# Altium PCB NBP11 Xilinx Spartan-III BGA456 Rev1.01.PcbDoc (part 2 of 3)
Units mm, origin at the board's own origin, x right, y up, seen from the top; angles counter-clockwise.
Board outline 69 x 80.99 mm, 6 copper layers (Top Layer, MidLayer1, InternalPlane1, InternalPlane2, MidLayer2, Bottom Layer); 105 components, 277 nets, 967 pads, 559 vias.
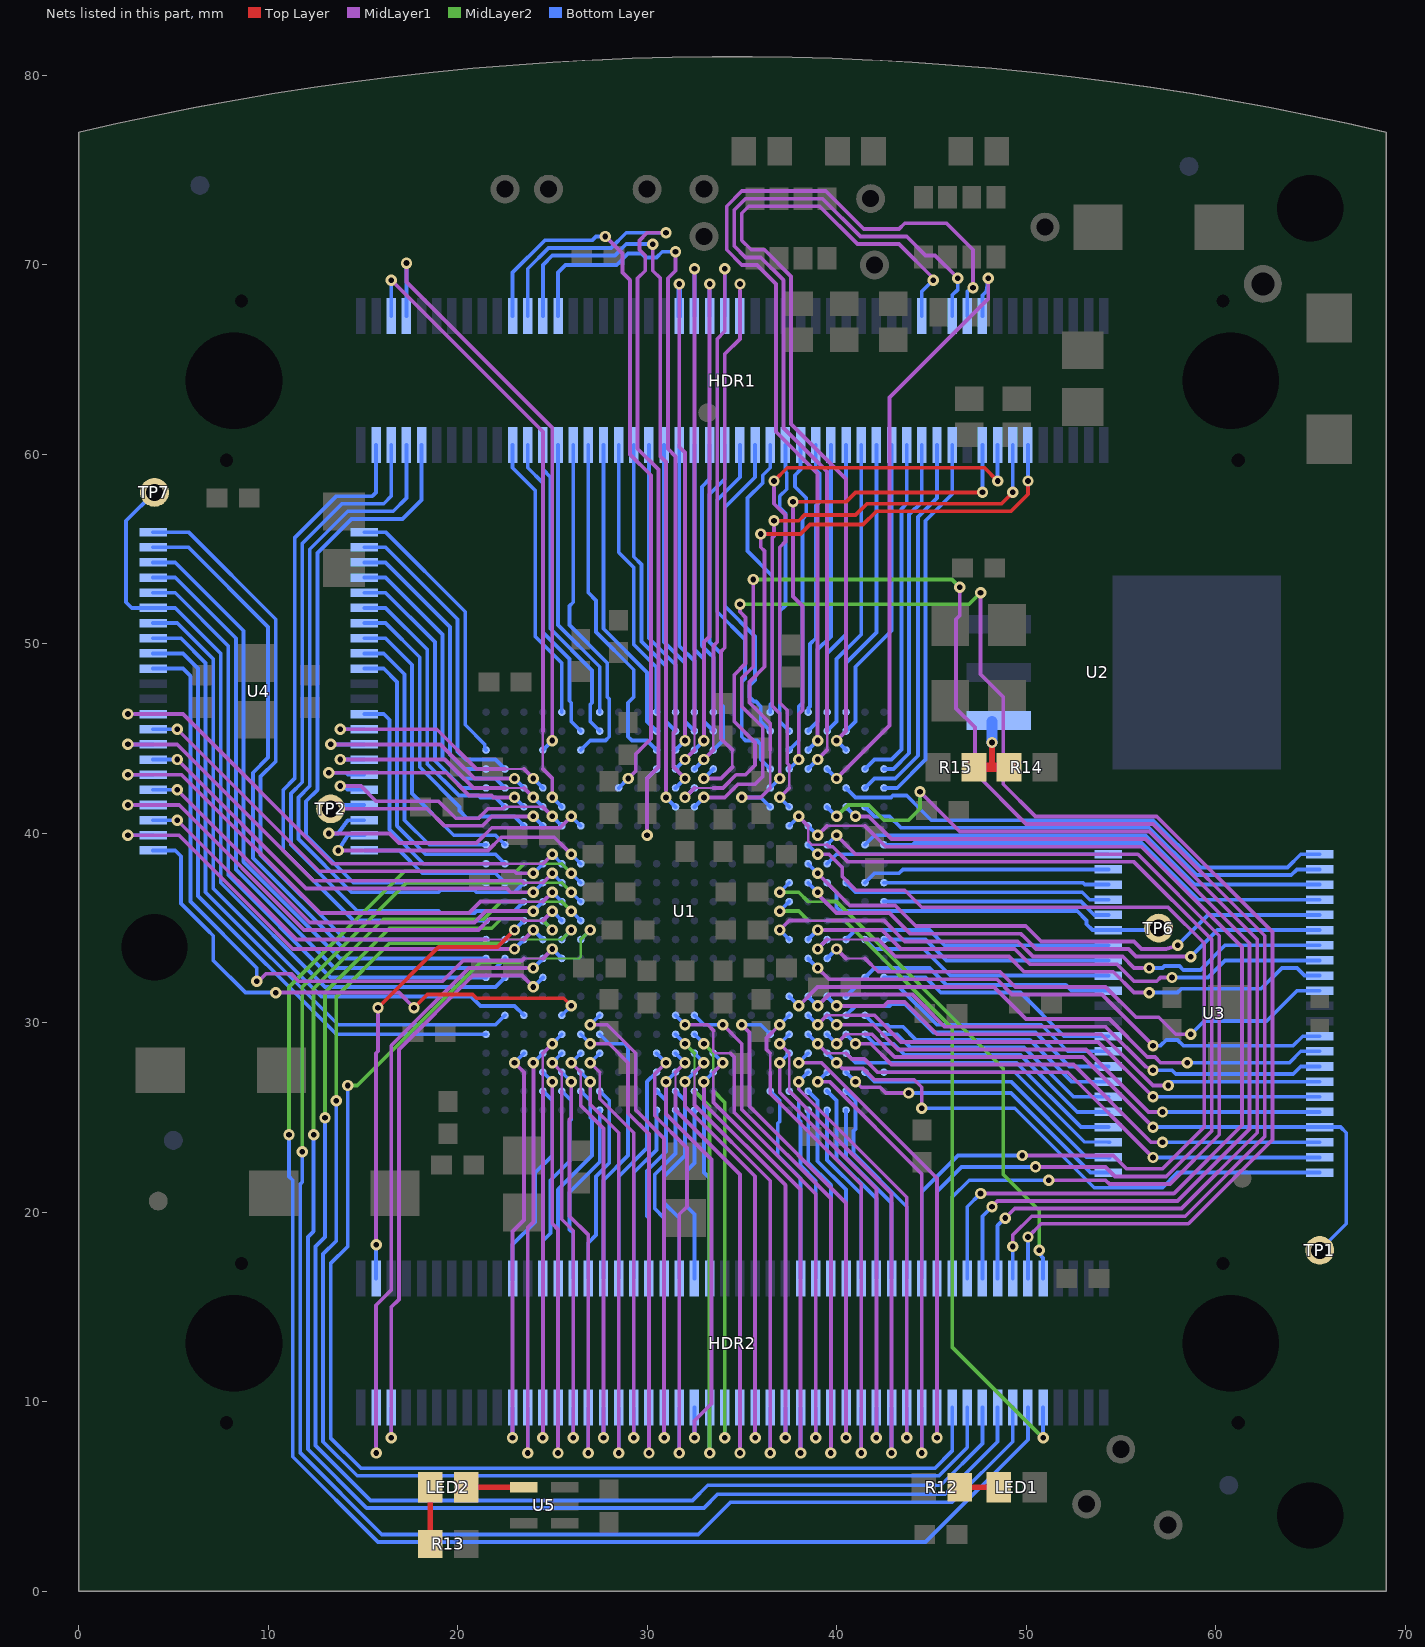
[diagram p6: the nets of this part, all layers, seen from the top]

## Via types
v1: diameter 0.6, hole 0.3, Top Layer to Bottom Layer, tented both sides, 480 vias
v2: diameter 2, hole 1.2, Top Layer to Bottom Layer, tented both sides, 42 vias
v3: diameter 0.9, hole 0.5, Top Layer to Bottom Layer, tented both sides, 33 vias
v4: diameter 0.8, hole 0.5, Top Layer to Bottom Layer, tented both sides, 2 vias
v5: diameter 1.3, hole 0.9, Top Layer to Bottom Layer, tented both sides, 1 vias
v6: diameter 1.8, hole 0.9, Top Layer to Bottom Layer, tented both sides, 1 vias

## Nets (pads, with @x,y where several pads share a name; then routed paths per layer and width w, separated by ;. In a path a pad name is that pad's centre, name@x,y a point inside that pad or via, vN(x,y) a via of type N, cw(c..) or ccw(c..) an arc to the next point about the centre after c; other vN are vias at no path point) (continued)
IO7: HDR2.21 U1.C19 | length 22.6
  MidLayer1 w0.2: v1(22.9,8.1) 22.9,19 23.5,19.6 23.5,27.4 v1(23,27.9)
  Bottom Layer w0.2: v1(22.9,8.1) HDR2.21@22.9,9.7 ; v1(23,27.9) U1.C19@23.5,28.4
IO8: HDR2.23 U1.D19 | length 23.8
  MidLayer1 w0.2: v1(23.7,7.3) 23.7,19.2 24,19.5 v1(24,27.9)
  Bottom Layer w0.2: v1(23.7,7.3) HDR2.23@23.7,9.7 ; v1(24,27.9) U1.D19@24.5,28.4
IO9: HDR2.25 U1.E18 | length 23.3
  MidLayer1 w0.127: 24.5,26.4 24.5,28.4
  MidLayer1 w0.2: v1(24.5,8.1) 24.5,26.4 ; 24.5,28.4 v1(25,28.9)
  Bottom Layer w0.2: v1(24.5,8.1) HDR2.25@24.5,9.7 ; v1(25,28.9) U1.E18@25.5,29.4
IO10: HDR2.27 U1.D20 | length 22.8
  MidLayer1 w0.2: v1(25,26.9) 25,19.4 25.3,19.1 v1(25.3,7.3)
  Bottom Layer w0.2: U1.D20@24.5,27.4 v1(25,26.9) ; v1(25.3,7.3) HDR2.27@25.3,9.7
IO11: HDR2.29 U1.E19 | length 22.6
  MidLayer1 w0.127: 25.5,26.4 25.5,27.4
  MidLayer1 w0.2: v1(25,27.9) 25.5,27.4 ; 25.5,26.4 25.5,19.634 26.1,19.034 v1(26.1,8.1)
  Bottom Layer w0.2: v1(25,27.9) U1.E19@25.5,28.4 ; v1(26.1,8.1) HDR2.29@26.1,9.7
IO12: HDR2.31 U1.E20 | length 23.2
  MidLayer1 w0.2: v1(26,26.9) 26,25 25.9,24.9 25.9,19.8 26.9,18.8 v1(26.9,7.3)
  Bottom Layer w0.2: U1.E20@25.5,27.4 v1(26,26.9) ; v1(26.9,7.3) HDR2.31@26.9,9.7
IO13: HDR2.33 U1.F19 | length 22.8
  MidLayer1 w0.127: 26.5,26.4 26.5,27.4
  MidLayer1 w0.2: v1(26,27.9) 26.5,27.4 ; 26.5,26.4 26.5,25.634 27.7,24.434 v1(27.7,8.1)
  Bottom Layer w0.2: v1(26,27.9) U1.F19@26.5,28.4 ; v1(27.7,8.1) HDR2.33@27.7,9.7
IO14: HDR2.35 U1.F20 | length 23.3
  MidLayer1 w0.2: v1(27,26.9) 27,25.7 28.5,24.2 v1(28.5,7.3)
  Bottom Layer w0.2: U1.F20@26.5,27.4 v1(27,26.9) ; v1(28.5,7.3) HDR2.35@28.5,9.7
IO15: HDR2.37 U1.G19 | length 23.1
  MidLayer1 w0.127: 27.5,26.4 27.5,27.4
  MidLayer1 w0.2: v1(27,27.9) 27.5,27.4 ; 27.5,26.4 27.5,26 29.3,24.2 v1(29.3,8.1)
  Bottom Layer w0.2: v1(27,27.9) U1.G19@27.5,28.4 ; v1(29.3,8.1) HDR2.37@29.3,9.7
IO16: HDR2.39 U1.F18 | length 26.6
  MidLayer1 w0.2: v1(27,28.9) 28,28.9 29,27.9 29,25.234 30.1,24.134 v1(30.1,7.3)
  Bottom Layer w0.2: U1.F18@26.5,29.4 v1(27,28.9) ; v1(30.1,7.3) HDR2.39@30.1,9.7
IO17: HDR2.41 U1.G17 | length 26.2
  MidLayer1 w0.2: v1(27,29.9) 27.9,29.9 29.4,28.4 29.4,25.4 30.9,23.9 v1(30.9,8.1)
  Bottom Layer w0.2: v1(27,29.9) U1.G17@27.5,30.4 ; v1(30.9,8.1) HDR2.41@30.9,9.7
IO18: HDR2.43 U1.K19 | length 24.8
  MidLayer1 w0.2: v1(31,27.9) 30.4,27.3 30.4,25.1 32.1,23.4 32.1,20.3 31.7,19.9 v1(31.7,7.3)
  Bottom Layer w0.2: U1.K19@30.5,28.4 v1(31,27.9) ; v1(31.7,7.3) HDR2.43@31.7,9.7
IO19: HDR2.45 U1.L20 | length 22.5
  MidLayer1 w0.2: v1(31,26.9) 31,25.2 33.4,22.8 33.4,9.9 32.5,9 v1(32.5,8.1)
  Bottom Layer w0.2: v1(31,26.9) U1.L20@31.5,27.4 ; v1(32.5,8.1) HDR2.45@32.5,9.7
IO20: HDR2.47 U1.L18 | length 25.2
  MidLayer2 w0.127: 32.5,26.4 32.5,28.4
  MidLayer2 w0.2: v1(32,28.9) 32.5,28.4 ; 32.5,26.4 33.3,25.6 v1(33.3,7.3)
  Bottom Layer w0.2: U1.L18@31.5,29.4 v1(32,28.9) ; v1(33.3,7.3) HDR2.47@33.3,9.7
IO21: HDR2.49 U1.M18 | length 23.6
  MidLayer2 w0.127: 33.5,26.4 33.5,28.4
  MidLayer2 w0.2: v1(33,28.9) 33.5,28.4 ; 33.5,26.4 34.1,25.8 v1(34.1,8.1)
  Bottom Layer w0.2: U1.M18@32.5,29.4 v1(33,28.9) ; v1(34.1,8.1) HDR2.49@34.1,9.7
IO22: HDR2.51 U1.L19 | length 25.3
  MidLayer1 w0.127: 31.5,26.4 31.5,27.4
  MidLayer1 w0.2: 31.5,26.4 31.5,25.4 34.9,22 v1(34.9,7.3) ; 31.5,27.4 v1(32,27.9)
  Bottom Layer w0.2: U1.L19@31.5,28.4 v1(32,27.9) ; v1(34.9,7.3) HDR2.51@34.9,9.7
IO23: HDR2.53 U1.M20 | length 22.6
  MidLayer1 w0.2: v1(32,26.9) 32,25.606 35.7,21.906 v1(35.7,8.1)
  Bottom Layer w0.2: v1(32,26.9) U1.M20@32.5,27.4 ; v1(35.7,8.1) HDR2.53@35.7,9.7
IO24: HDR2.55 U1.M19 | length 25.6
  MidLayer1 w0.127: 32.5,26.4 32.5,27.4
  MidLayer1 w0.2: 32.5,26.4 32.5,25.672 36.5,21.672 v1(36.5,7.3) ; 32.5,27.4 v1(33,27.9)
  Bottom Layer w0.2: U1.M19@32.5,28.4 v1(33,27.9) ; v1(36.5,7.3) HDR2.55@36.5,9.7
IO25: HDR2.57 U1.N20 | length 22.9
  MidLayer1 w0.2: v1(33,26.9) 33,25.737 37.3,21.437 v1(37.3,8.1)
  Bottom Layer w0.2: v1(33,26.9) U1.N20@33.5,27.4 ; v1(37.3,8.1) HDR2.57@37.3,9.7
IO26: HDR2.59 U1.N19 | length 25.8
  MidLayer1 w0.127: 33.5,26.4 33.5,27.4
  MidLayer1 w0.2: 33.5,26.4 33.5,25.803 38.1,21.203 v1(38.1,7.3) ; 33.5,27.4 v1(34,27.9)
  Bottom Layer w0.2: U1.N19@33.5,28.4 v1(34,27.9) ; v1(38.1,7.3) HDR2.59@38.1,9.7
IO27: HDR2.61 U1.L17 | length 28.3
  MidLayer1 w0.127: 33.4,29.7 33.5,29.6 33.5,28.5 33.6,28.4 34.4,28.4
  MidLayer1 w0.2: v1(32,29.9) 33.2,29.9 33.5,29.6 ; 34.4,28.4 34.6,28.2 34.6,25.269 38.9,20.969 v1(38.9,8.1)
  Bottom Layer w0.2: U1.L17@31.5,30.4 v1(32,29.9) ; v1(38.9,8.1) HDR2.61@38.9,9.7
IO28: HDR2.63 U1.M17 | length 29.1
  MidLayer1 w0.2: v1(34,29.9) 35,28.9 35,25.434 39.7,20.734 v1(39.7,7.3)
  Bottom Layer w0.2: U1.M17@32.5,30.4 33,29.9 v1(34,29.9) ; v1(39.7,7.3) HDR2.63@39.7,9.7
IO29: HDR2.65 U1.T18 | length 27.4
  MidLayer1 w0.2: v1(35,29.9) 35.4,29.5 35.4,25.6 40.5,20.5 v1(40.5,8.1)
  Bottom Layer w0.2: v1(35,29.9) 36,29.9 U1.T18@36.5,29.4 ; v1(40.5,8.1) HDR2.65@40.5,9.7
IO30: HDR2.67 U1.U17 | length 28.1
  MidLayer1 w0.127: 36.5,27.4 36.5,28.4
  MidLayer1 w0.2: 36.5,27.4 36.5,26.269 41.3,21.469 v1(41.3,7.3) ; 36.5,28.4 36.3,28.6 36.3,29.2 v1(37,29.9)
  Bottom Layer w0.2: v1(37,29.9) U1.U17@37.5,30.4 ; v1(41.3,7.3) HDR2.67@41.3,9.7
IO31: HDR2.69 U1.U19 | length 24.2
  MidLayer1 w0.2: v1(37,27.9) 37,26.334 42.1,21.234 v1(42.1,8.1)
  Bottom Layer w0.2: v1(37,27.9) U1.U19@37.5,28.4 ; v1(42.1,8.1) HDR2.69@42.1,9.7
IO32: HDR2.71 U1.U18 | length 27.2
  MidLayer1 w0.127: 37.5,26.4 37.5,28.4
  MidLayer1 w0.2: v1(37,28.9) 37.5,28.4 ; 37.5,26.4 42.9,21 v1(42.9,7.3)
  Bottom Layer w0.2: v1(37,28.9) U1.U18@37.5,29.4 ; v1(42.9,7.3) HDR2.71@42.9,9.7
IO33: HDR2.73 U1.V20 | length 23.5
  MidLayer1 w0.2: v1(38,26.9) 38,26.5 43.7,20.8 v1(43.7,8.1)
  Bottom Layer w0.2: v1(38,26.9) U1.V20@38.5,27.4 ; v1(43.7,8.1) HDR2.73@43.7,9.7
IO34: HDR2.75 U1.W20 | length 25.4
  MidLayer1 w0.2: v1(39,26.9) 39.634,26.9 44.5,22.034 v1(44.5,7.3)
  Bottom Layer w0.2: v1(39,26.9) U1.W20@39.5,27.4 ; v1(44.5,7.3) HDR2.75@44.5,9.7
IO35: HDR2.77 U1.V19 | length 25.8
  MidLayer1 w0.2: v1(38,27.9) 39.2,27.9 45.3,21.8 v1(45.3,8.1)
  Bottom Layer w0.2: v1(38,27.9) U1.V19@38.5,28.4 ; v1(45.3,8.1) HDR2.77@45.3,9.7
JIOA0: HDR1.3 U1.A12 | length 36.8
  Bottom Layer w0.2: HDR1.3@15.7,60.5 15.7,58 15.5,57.8 13.6,57.8 11.4,55.6 11.4,42.9 10.8,42.3 10.8,39.1 14.5,35.4 21,35.4 U1.A12@21.5,35.4
JIOA1: HDR1.5 U1.C11 | length 38.6
  Bottom Layer w0.2: HDR1.5@16.5,60.5 16.5,57.8 16.1,57.4 13.9,57.4 11.8,55.3 11.8,42.7 11.2,42.1 11.2,39.4 14.7,35.9 19,35.9 19.1,35.8 20.9,35.8 21,35.9 23,35.9 U1.C11@23.5,36.4
JIOA2: HDR1.7 U1.C10 | length 37.9
  Bottom Layer w0.2: HDR1.7@17.3,60.5 17.3,57.7 16.6,57 14.2,57 12.2,55 12.2,42.5 11.6,41.9 11.6,39.7 14.4,36.9 19,36.9 19.1,37 20.9,37 21,36.9 23,36.9 U1.C10@23.5,37.4
JIOA3: HDR1.9 U1.A10 | length 35.2
  Bottom Layer w0.2: HDR1.9@18.1,60.5 18.1,57.6 17.1,56.6 14.4,56.6 12.6,54.8 12.6,42.3 12,41.7 12,39.9 14.5,37.4 U1.A10@21.5,37.4
JIOB0: HDR1.83 U1.U4 | length 27.3
  Top Layer w0.2: v1(37.7,57.5) 40.5,57.5 41,58 v1(47.7,58)
  MidLayer1 w0.2: v1(37.7,57.5) 37.7,52.5 38.2,52 38.2,46.5 38,46.3 v1(38,43.9)
  Bottom Layer w0.2: U1.U4@37.5,43.4 v1(38,43.9) ; v1(47.7,58) HDR1.83@47.7,60.5
JIOB1: HDR1.85 U1.U6 | length 32.5
  Top Layer w0.2: v1(36.7,58.6) 37.4,59.3 47.8,59.3 v1(48.5,58.6)
  MidLayer1 w0.127: 37.5,42.4 37.5,43.4
  MidLayer1 w0.2: v1(36.7,58.6) 36.7,57.4 37.3,56.8 37.3,55.4 37,55.1 37,46.9 37.4,46.5 37.4,43.7 37.5,43.6 37.5,43.4 ; v1(37,41.9) 37.5,42.4
  Bottom Layer w0.2: v1(37,41.9) U1.U6@37.5,41.4 ; v1(48.5,58.6) HDR1.85@48.5,60.5
JIOB2: HDR1.87 U1.T5 | length 30.2
  Top Layer w0.2: v1(36.7,56.5) 38,56.5 38.3,56.8 41,56.8 41.6,57.4 48.7,57.4 v1(49.3,58)
  MidLayer1 w0.2: v1(36.7,56.5) 36.7,55.7 36.6,55.6 36.6,46.734 37,46.334 v1(37,42.9)
  Bottom Layer w0.2: U1.T5@36.5,42.4 36.55,42.45 v1(37,42.9) ; v1(49.3,58) HDR1.87@49.3,60.5
JIOB3: HDR1.89 U1.T6 | length 35.3
  Top Layer w0.2: v1(36,55.8) 38.1,55.8 38.6,56.3 41.4,56.3 42.1,57 49.2,57 50.1,57.9 v1(50.1,58.6)
  MidLayer1 w0.127: 36.5,42.4 36.5,44.4
  MidLayer1 w0.2: v1(35,41.9) 36,41.9 36.5,42.4 ; v1(36,55.8) 36,55.1 36.2,54.9 36.2,48.8 35.4,48 35.4,46.9 36.5,45.8 36.5,44.4
  Bottom Layer w0.2: v1(35,41.9) 36,41.9 U1.T6@36.5,41.4 ; v1(50.1,58.6) HDR1.89@50.1,60.5
KBCLOCK: HDR1.22 U1.H5 | length 38.8
  MidLayer1 w0.2: v1(27.8,71.5) 28.7,70.6 28.7,69.6 29.1,69.2 29.1,60 30.2,58.9 30.2,45 29.4,44.2 29.4,43.3 v1(29,42.9)
  Bottom Layer w0.2: HDR1.22@22.9,67.3 22.9,69.6 24.6,71.3 27.1,71.3 27.3,71.5 v1(27.8,71.5) ; U1.H5@28.5,42.4 v1(29,42.9)
KBDATA: HDR1.24 U1.K4 | length 48.3
  MidLayer1 w0.2: v1(30,39.9) 30,42.9 30.6,43.5 30.6,59.2 29.5,60.3 29.5,69.3 29.9,69.7 29.9,70.5 29.6,70.8 29.6,71.3 30,71.7 v1(31,71.7)
  Bottom Layer w0.2: HDR1.24@23.7,67.3 23.7,69.8 24.8,70.9 28.1,70.9 28.9,71.7 v1(31,71.7) ; v1(30,39.9) 30,42.9 U1.K4@30.5,43.4
LCD_BCKL: HDR2.22 U1.D21 | length 11.1
  Bottom Layer w0.2: HDR2.22@22.9,16.4 HDR2.22@22.9,16.5 22.9,18.3 24.1,19.5 24.1,22.1 25,23 25,25.9 U1.D21@24.5,26.4
LCD_E: HDR2.26 U1.E21 | length 10.7
  Bottom Layer w0.2: HDR2.26@24.5,16.5 24.5,18.5 24.9,18.9 24.9,21.7 25.9,22.7 25.9,24.8 26,24.9 26,25.9 U1.E21@25.5,26.4
LED0: HDR2.60 U1.T21 | length 10.6
  Bottom Layer w0.2: U1.T21@36.5,26.4 37,25.9 37,24.8 36.9,24.7 36.9,23 38.1,21.8 HDR2.60@38.1,16.5
LED1: HDR2.62 U1.U21 | length 10.5
  Bottom Layer w0.2: U1.U21@37.5,26.4 38,25.9 38,24.9 38.1,24.8 38.1,22.472 38.9,21.672 HDR2.62@38.9,16.5
LED2: HDR2.64 U1.V22 | length 9.4
  Bottom Layer w0.2: U1.V22@38.5,25.4 38.5,22.637 39.7,21.437 HDR2.64@39.7,16.5
LED3: HDR2.66 U1.V21 | length 10.7
  Bottom Layer w0.2: U1.V21@38.5,26.4 39,25.9 39,22.703 40.5,21.203 HDR2.66@40.5,16.5
LED4: HDR2.68 U1.W22 | length 9.6
  Bottom Layer w0.2: U1.W22@39.5,25.4 39.5,22.769 41.3,20.969 HDR2.68@41.3,16.5
LED5: HDR2.70 U1.W21 | length 11
  Bottom Layer w0.2: U1.W21@39.5,26.4 40,25.9 40,22.834 42.1,20.734 HDR2.70@42.1,16.5
LED6: HDR2.72 U1.Y22 | length 9.9
  Bottom Layer w0.2: U1.Y22@40.5,25.4 40.5,22.9 42.9,20.5 HDR2.72@42.9,16.5
LED7: HDR2.74 U1.Y21 | length 11.3
  Bottom Layer w0.2: U1.Y21@40.5,26.4 41,25.9 41,24.4 40.9,24.3 40.9,23.1 43.7,20.3 HDR2.74@43.7,16.5
MOUSECLOCK: HDR1.26 U1.L6 | length 39.4
  MidLayer1 w0.2: v1@30.4,70.946 v1@30.3,71.046 ; v1(31,41.9) 31,59.6 30.7,59.9 30.7,69.3 30.3,69.7 v1@30.3,71.046 ; v1@30.3,71.046 30.273,71.073 30.246,71.1 v1(30.3,71.1) v1@30.3,71.046
  Bottom Layer w0.2: HDR1.26@24.5,67.3 24.5,70 24.998,70.498 28.298,70.498 28.9,71.1 v1(30.3,71.1) ; v1(31,41.9) U1.L6@31.5,41.4
MOUSEDATA: HDR1.28 U1.L5 | length 38.2
  MidLayer1 w0.2: v1(31.5,70.7) 31.5,69.7 31.1,69.3 31.1,60.3 31.5,59.9 31.5,45.4 31.4,45.3 31.4,43.5 v1(32,42.9)
  Bottom Layer w0.2: HDR1.28@25.3,67.3 25.3,69.6 25.7,70 28.4,70 29,70.6 29.7,70.6 29.9,70.4 30.5,70.4 30.8,70.7 v1(31.5,70.7) ; U1.L5@31.5,42.4 v1(32,42.9)
NetLED1_1: LED1.1 R12.2 | length 2.1
  Top Layer w0.3: R12.2@46.5,5.5 LED1.1@48.55,5.5
NetLED2_1: LED2.1 R13.1 | length 3
  Top Layer w0.3: R13.1@18.55,2.5 LED2.1@18.55,5.5
NetLED2_2: LED2.2 U5.4 | length 3
  Top Layer w0.3: LED2.2@20.45,5.5 U5.4@23.5,5.5
NetR14_2: R14.2 R15.1 U2.1 | length 4.3
  Top Layer w0.3: 48.2,43.5 v1(48.2,44.8)
  Top Layer w0.5: R15.1@47.25,43.5 48.2,43.5 R14.2@49.1,43.5
  Bottom Layer w0.5: v1@48.15,44.95 v1@48.2,45
  Bottom Layer w0.6: v1(48.2,44.8) 48.2,45 U2.1@48.2,45.9
NEXUS_TCK: HDR1.82 U1.V3 | length 50
  MidLayer1 w0.2: v1(39,44.9) 39,59 36.8,61.2 36.8,69 35.8,70 35,70 34.2,70.8 34.2,73.1 35,73.9 39.431,73.9 41.431,71.9 41.7,71.9 ; 41.6,71.9 43.3,71.9 43.6,72.2 45.8,72.2 47.2,70.8 v1(47.2,68.8)
  Bottom Layer w0.2: U1.V3@38.5,44.4 v1(39,44.9) ; HDR1.82@46.9,67.3 46.9,68.6 v1(47.2,68.8)
NEXUS_TDI: HDR1.84 U1.W4 | length 32.5
  MidLayer1 w0.2: v1(40,42.9) 42.8,45.7 42.8,63 48,68.2 v1(48,69.3)
  Bottom Layer w0.2: U1.W4@39.5,43.4 v1(40,42.9) ; HDR1.84@47.7,67.3 47.7,68.4 47.9,68.6 v1(48,69.3)
NEXUS_TDO: HDR1.76 U1.Y3 | length 45.5
  MidLayer1 w0.2: v1(40,44.9) 40.5,45.4 40.5,58.7 37.6,61.6 37.6,69.4 36.2,70.8 35.5,70.8 35,71.3 35,72.7 35,72.734 35.366,73.1 39.1,73.1 41.1,71.1 43.3,71.1 45.1,69.3 v1(45.1,69.2)
  Bottom Layer w0.2: v1(40,44.9) U1.Y3@40.5,44.4 ; HDR1.76@44.5,67.3 44.5,68.6 v1(45.1,69.2)
NEXUS_TMS: HDR1.80 U1.V4 | length 48.3
  MidLayer1 w0.127: 39.5,44.4 39.5,45.4
  MidLayer1 w0.2: v1(39,43.9) 39.5,44.4 ; 39.5,45.4 39.5,59.1 37.2,61.4 37.2,69.2 36,70.4 35.2,70.4 34.6,71 34.6,72.9 35.2,73.5 39.266,73.5 41.266,71.5 43.7,71.5 44.7,70.5 45.2,70.5 v1(46.4,69.3)
  Bottom Layer w0.2: U1.V4@38.5,43.4 v1(39,43.9) ; HDR1.80@46.1,67.3 46.1,68.4 46.4,68.7 v1(46.4,69.3)
RAM0_DATA0: HDR2.42 U1.L22 | length 9.6
  Bottom Layer w0.2: HDR2.42@30.9,16.5 30.9,19.7 30.4,20.2 30.4,22 31.5,23.1 U1.L22@31.5,25.4
RAM0_DATA1: HDR2.40 U1.K21 | length 10.6
  Bottom Layer w0.2: HDR2.40@30.1,16.5 30.1,19.7 30,19.8 30,22.2 31,23.2 31,25.9 U1.K21@30.5,26.4
RAM0_DATA2: HDR2.38 U1.K22 | length 9.4
  Bottom Layer w0.2: HDR2.38@29.3,16.5 29.3,22.1 30.5,23.3 U1.K22@30.5,25.4
RAM0_DATA3: HDR2.36 U1.K20 | length 11.7
  Bottom Layer w0.2: HDR2.36@28.5,16.5 28.5,21.9 30,23.4 30,26.9 U1.K20@30.5,27.4
RAM0_DATA4: HDR2.34 U1.G18 | length 14.5
  Bottom Layer w0.2: U1.G18@27.5,29.4 28,28.9 28.8,28.9 29,28.7 29,23 27.7,21.7 HDR2.34@27.7,16.5
RAM0_DATA5: HDR2.32 U1.G21 | length 10.6
  Bottom Layer w0.2: HDR2.32@26.9,16.5 26.9,18.4 27.3,18.8 27.3,21.9 28,22.6 28,25.9 U1.G21@27.5,26.4
RAM0_DATA6: HDR2.30 U1.G22 | length 9.6
  Bottom Layer w0.2: HDR2.30@26.1,16.5 26.1,18.9 25.9,19.1 25.9,21.066 27.5,22.666 U1.G22@27.5,25.4
RAM0_DATA7: HDR2.28 U1.F21 | length 10.9
  Bottom Layer w0.2: HDR2.28@25.3,16.5 25.3,21.2 27.1,23 27.1,24.9 27,25 27,25.9 U1.F21@26.5,26.4
RAM0_OE: HDR1.41 U1.M2 | length 15.8
  Bottom Layer w0.2: HDR1.41@30.9,60.5 30.9,50.1 32,49 32,45.9 U1.M2@32.5,45.4
RAM0_WE: HDR1.79 U1.AB5 | length 20
  Bottom Layer w0.2: U1.AB5@42.5,42.4 43.2,42.4 44.7,43.9 44.7,56.5 46.1,57.9 HDR1.79@46.1,60.5
RAM1_DATA0: HDR1.45 U1.N2 | length 15.5
  Bottom Layer w0.2: HDR1.45@32.5,60.5 32.5,49.7 33,49.2 33,45.9 U1.N2@33.5,45.4
RAM1_DATA1: HDR1.49 U1.N3 | length 16.9
  Bottom Layer w0.2: U1.N3@33.5,44.4 34,44.9 34,46.7 33.9,46.8 33.9,49.5 33.3,50.1 33.3,57.9 34.1,58.7 HDR1.49@34.1,60.5
RAM1_DATA2: HDR1.53 U1.T2 | length 17.1
  Bottom Layer w0.2: HDR1.53@35.7,60.5 35.7,58.8 34.1,57.2 34.1,52 35.7,50.4 35.7,48.1 35.4,47.8 35.4,47.2 35.641,46.959 35.741,46.959 36,46.7 36,45.9 U1.T2@36.5,45.4
RAM1_DATA3: HDR1.57 U1.U2 | length 15.7
  Bottom Layer w0.2: HDR1.57@37.3,60.5 37.3,59.1 37.367,59.033 37.367,58.167 37,57.8 37,57.2 37.3,56.9 37.3,52.025 37,51.725 37,45.9 U1.U2@37.5,45.4
RAM1_DATA4: HDR1.55 U1.T1 | length 15.2
  Bottom Layer w0.2: U1.T1@36.5,46.4 36.5,46.8 36.6,46.9 36.6,53.6 35.3,54.9 35.3,57.7 36.1,58.5 36.1,58.9 36.5,59.3 HDR1.55@36.5,60.5
RAM1_DATA5: HDR1.51 U1.T4 | length 19.2
  Bottom Layer w0.2: HDR1.51@34.9,60.5 34.9,58.8 33.7,57.6 33.7,51.7 35.17,50.23 35.17,48.17 35,48 35,45.1 35.2,44.9 35.8,44.9 36,44.7 36,43.9 U1.T4@36.5,43.4
RAM1_DATA6: HDR1.47 U1.N1 | length 14.5
  Bottom Layer w0.2: HDR1.47@33.3,60.5 33.3,58.7 32.9,58.3 32.9,49.9 33.3,49.5 33.5,49.3 U1.N1@33.5,46.4
RAM1_DATA7: HDR1.43 U1.M1 | length 14.4
  Bottom Layer w0.2: HDR1.43@31.7,60.5 31.7,49.9 32.5,49.1 U1.M1@32.5,46.4
RAM1_OE: HDR1.39 U1.L1 | length 14.7
  Bottom Layer w0.2: HDR1.39@30.1,60.5 30.1,50.3 31.5,48.9 U1.L1@31.5,46.4
RAM1_WE: HDR1.61 U1.V1 | length 14.4
  Bottom Layer w0.2: U1.V1@38.5,46.4 38.5,46.6 38.6,46.7 38.6,50 38.9,50.3 38.9,57.3 39.1,57.5 39.1,59 38.9,59.2 HDR1.61@38.9,60.5
RAM_ADDR0: HDR1.21 U1.E1 | length 15.2
  Bottom Layer w0.2: HDR1.21@22.9,60.5 22.9,59.3 24.1,58.1 24.1,50.4 25.5,49 U1.E1@25.5,46.4
RAM_ADDR1: HDR1.25 U1.G2 | length 16.4
  Bottom Layer w0.2: HDR1.25@24.5,60.5 24.5,59.2 24.9,58.8 24.9,50.8 27.1,48.6 27.1,46.9 27,46.8 27,45.9 U1.G2@27.5,45.4
RAM_ADDR2: HDR1.29 U1.F3 | length 18.1
  Bottom Layer w0.2: HDR1.29@26.1,60.5 26.1,52.2 25.9,52 25.9,51 27.9,49 27.9,47.2 28,47.1 28,45.1 27.8,44.9 27,44.9 U1.F3@26.5,44.4
RAM_ADDR3: HDR1.33 U1.K2 | length 16.3
  Bottom Layer w0.2: HDR1.33@27.7,60.5 27.7,50.8 30,48.5 30,45.9 U1.K2@30.5,45.4
RAM_ADDR4: HDR1.65 U1.W1 | length 14.5
  Bottom Layer w0.2: U1.W1@39.5,46.4 39.5,49.5 40.5,50.5 HDR1.65@40.5,60.5
RAM_ADDR5: HDR1.69 U1.Y1 | length 14.8
  Bottom Layer w0.2: U1.Y1@40.5,46.4 40.5,49 42.1,50.6 HDR1.69@42.1,60.5
RAM_ADDR6: HDR1.73 U1.AA4 | length 18.5
  Bottom Layer w0.2: U1.AA4@41.5,43.4 42,43.9 42.9,43.9 43.427,44.427 43.427,57.127 43.7,57.4 HDR1.73@43.7,60.5
RAM_ADDR7: HDR1.77 U1.AA5 | length 20.3
  Bottom Layer w0.2: U1.AA5@41.5,42.4 42,42.9 43.1,42.9 44.3,44.1 44.3,56.7 45.3,57.7 HDR1.77@45.3,60.5
RAM_ADDR8: HDR1.75 U1.AB4 | length 18.2
  Bottom Layer w0.2: U1.AB4@42.5,43.4 43,43.4 43.827,44.227 43.827,56.827 44.5,57.5 HDR1.75@44.5,60.5
RAM_ADDR9: HDR1.71 U1.Y2 | length 16.1
  Bottom Layer w0.2: U1.Y2@40.5,45.4 41,45.9 41,48.8 42.9,50.7 HDR1.71@42.9,60.5
RAM_ADDR10: HDR1.67 U1.W2 | length 15.8
  Bottom Layer w0.2: U1.W2@39.5,45.4 40,45.9 40,49.2 41.3,50.5 HDR1.67@41.3,60.5
RAM_ADDR11: HDR1.63 U1.V2 | length 15.6
  Bottom Layer w0.2: U1.V2@38.5,45.4 39,45.9 39,49.7 39.7,50.4 HDR1.63@39.7,60.5
RAM_ADDR12: HDR1.59 U1.U3 | length 16.8
  Bottom Layer w0.2: U1.U3@37.5,44.4 38,44.9 38,46.7 38.2,46.9 38.2,56.6 38.4,56.8 38.4,57.7 37.8,58.3 37.8,58.9 38.1,59.2 HDR1.59@38.1,60.5
RAM_ADDR13: HDR1.35 U1.K1 | length 14.9
  Bottom Layer w0.2: HDR1.35@28.5,60.5 28.5,54.834 29.3,54.034 29.3,49.969 30.5,48.769 U1.K1@30.5,46.4
RAM_ADDR14: HDR1.31 U1.K3 | length 18.3
  Bottom Layer w0.2: HDR1.31@26.9,60.5 26.9,52.7 27.3,52.3 27.3,50.634 29.3,48.634 29.3,47.2 29,46.9 29,45.1 29.2,44.9 30,44.9 U1.K3@30.5,44.4
RAM_ADDR15: HDR1.27 U1.G1 | length 15
  Bottom Layer w0.2: HDR1.27@25.3,60.5 25.3,51 27.5,48.8 U1.G1@27.5,46.4
RAM_ADDR16: HDR1.23 U1.F2 | length 16.3
  Bottom Layer w0.2: HDR1.23@23.7,60.5 23.7,59.3 24.5,58.5 24.5,50.6 25.9,49.2 25.9,47 26,46.9 26,45.9 U1.F2@26.5,45.4
RAM_CS: HDR1.37 U1.L2 | length 16
  Bottom Layer w0.2: HDR1.37@29.3,60.5 29.3,54.6 29.7,54.2 29.7,50.134 31,48.834 31,45.9 U1.L2@31.5,45.4
RED0: HDR1.6 U1.E6 | length 33.4
  MidLayer1 w0.127: 24.5,43.4 24.5,45.4
  MidLayer1 w0.2: v1(16.5,69.2) 24.5,61.2 24.5,45.4 ; 24.5,43.4 25,42.9 v1(25,41.9)
  Bottom Layer w0.2: HDR1.6@16.5,67.3 v1(16.5,69.2) ; v1(25,41.9) 25.45,41.45 U1.E6@25.5,41.4
RED1: HDR1.8 U1.D3 | length 31.9
  MidLayer1 w0.2: v1(17.3,70.1) 17.3,69.1 25,61.4 v1(25,44.9)
  Bottom Layer w0.2: HDR1.8@17.3,67.3 v1(17.3,70.1) ; U1.D3@24.5,44.4 v1(25,44.9)
REF_CLK: HDR2.4 U1.C12 | length 23.9
  Top Layer w0.2: v1(15.8,30.8) 19,34 22.1,34 v1(23,34.9)
  MidLayer1 w0.2: v1(15.7,18.3) 15.7,28.4 15.8,28.5 v1(15.8,30.8)
  Bottom Layer w0.2: HDR2.4@15.7,16.5 v1(15.7,18.3) ; v1(23,34.9) U1.C12@23.5,35.4
SCL: HDR2.5 U1.D15 | length 31.9
  MidLayer1 w0.2: v1(16.5,8.1) 16.5,15 16.9,15.4 16.9,28.6 20.8,32.5 23.4,32.5 v1(24,31.9)
  Bottom Layer w0.2: v1(16.5,8.1) HDR2.5@16.5,9.7 ; v1(24,31.9) U1.D15@24.5,32.4
SDA: HDR2.3 U1.D14 | length 34.1
  MidLayer1 w0.2: v1(15.7,7.3) 15.7,15.1 16.5,15.9 16.5,28.8 20.6,32.9 v1(24,32.9)
  Bottom Layer w0.2: v1(15.7,7.3) HDR2.3@15.7,9.7 ; v1(24,32.9) U1.D14@24.5,33.4
SP0: HDR2.79 U1.F13 | length 72.5
  MidLayer2 w0.127: 23.5,33.4 26.4,33.4 26.5,33.5 26.5,34.4
  MidLayer2 w0.2: v1(14.2,26.7) 14.7,26.7 21.2,33.2 23.3,33.2 23.5,33.4 ; 26.5,34.4 v1(27,34.9)
  Bottom Layer w0.2: v1(14.2,26.7) 14.2,18.2 13.3,17.3 13.3,8.1 14.9,6.5 45.2,6.5 46.1,7.4 HDR2.79@46.1,9.7 ; U1.F13@26.5,34.4 26.55,34.45 v1(27,34.9)
SP1: HDR2.81 U1.E13 | length 75.8
  MidLayer2 w0.127: 22.5,34.4 25.5,34.4
  MidLayer2 w0.2: v1(13.6,25.9) 13.6,31.4 16.4,34.2 22.3,34.2 22.5,34.4 ; 25.5,34.4 v1(26,34.9)
  Bottom Layer w0.2: v1(13.6,25.9) 13.6,18.5 12.9,17.8 12.9,7.9 14.7,6.1 45.4,6.1 46.9,7.6 HDR2.81@46.9,9.7 ; U1.E13@25.5,34.4 25.55,34.45 v1(26,34.9)
SP2: HDR2.83 U1.D12 | length 78.2
  MidLayer2 w0.127: 23.5,35.4 24.5,35.4
  MidLayer2 w0.2: v1(13,25) 13,31.6 16.4,35 21.8,35 22.3,35.5 23.4,35.5 23.5,35.4 ; 24.5,35.4 v1(25,34.9)
  Bottom Layer w0.2: v1(13,25) 13,18.7 12.5,18.2 12.5,7.7 15.4,4.8 32.4,4.8 33.2,5.6 45.5,5.6 47.7,7.8 HDR2.83@47.7,9.7 ; U1.D12@24.5,35.4 v1(25,34.9)
SP3: HDR2.85 U1.F12 | length 81.8
  MidLayer2 w0.127: 23.5,36.4 25.5,36.4
  MidLayer2 w0.2: v1(12.4,24.1) 12.4,31.8 16.073,35.473 21.373,35.473 22.3,36.4 23.5,36.4 ; 25.5,36.4 v1(26,35.9)
  Bottom Layer w0.2: v1(12.4,24.1) 12.4,19 12.1,18.7 12.1,7.5 15.2,4.4 33,4.4 33.723,5.123 45.723,5.123 48.5,7.9 HDR2.85@48.5,9.7 ; v1(26,35.9) U1.F12@26.5,35.4
SP4: HDR2.87 U1.F11 | length 85.2
  MidLayer2 w0.127: 23.5,37.4 25.5,37.4
  MidLayer2 w0.2: v1(11.8,23.2) 11.8,31.9 17.3,37.4 23.5,37.4 ; 25.5,37.4 v1(26,36.9)
  Bottom Layer w0.2: v1(11.8,23.2) 11.8,21.6 11.7,21.5 11.7,7.3 16,3 32.7,3 34.4,4.7 46.1,4.7 49.3,7.9 HDR2.87@49.3,9.7 ; v1(26,36.9) 26.45,36.45 U1.F11@26.5,36.4
SP5: HDR2.89 U1.F10 | length 88
  MidLayer2 w0.127: 23.5,38.4 25.5,38.4
  MidLayer2 w0.2: v1(11.1,24.1) 11.1,31.9 17.2,38 23.1,38 23.5,38.4 ; 25.5,38.4 v1(26,37.9)
  Bottom Layer w0.2: v1(11.1,24.1) 11.1,21.9 11.3,21.7 11.3,7.1 15.8,2.6 44.7,2.6 50.1,8 HDR2.89@50.1,9.7 ; v1(26,37.9) U1.F10@26.5,37.4
SP6: HDR2.91 U1.U11 | length 37.6
  MidLayer2 w0.127: 38.5,35.4 39.5,35.4
  MidLayer2 w0.2: v1(37,35.9) 38,35.9 38.5,35.4 ; 39.5,35.4 40.434,35.4 46.1,29.734 46.1,12.9 v1(50.9,8.1)
  Bottom Layer w0.2: v1(37,35.9) U1.U11@37.5,36.4 ; v1(50.9,8.1) HDR2.91@50.9,9.7
SP7: HDR2.90 U1.M5 | length 83.6
  MidLayer1 w0.127: 32.5,42.4 33.5,42.4
  MidLayer1 w0.2: v1(32,41.9) 32.5,42.4 ; 33.5,42.4 34,42.4 34.7,43.1 35.2,43.1 35.7,43.6 35.7,44.8 34.6,45.9 34.6,48.366 35.2,48.966 35.2,51.4 34.9,51.7 v1(34.9,52.1) ; v1(47.6,52.7) 47.6,48.4 48.8,47.2 48.8,42.6 50.5,40.9 56.9,40.9 63,34.8 63,23.834 58.566,19.4 57.9,19.4 50.8,19.4 v1(50.1,18.7)
  MidLayer2 w0.2: v1(34.9,52.1) 47,52.1 v1(47.6,52.7)
  Bottom Layer w0.2: v1(32,41.9) U1.M5@32.5,42.4 ; HDR2.90@50.1,16.5 50.1,18.3 v1(50.1,18.7)
SP8: HDR2.92 U1.U10 | length 28.3
  MidLayer2 w0.127: 38.5,36.4 39.5,36.4
  MidLayer2 w0.2: v1(37,36.9) 38,36.9 38.5,36.4 ; 39.5,36.4 40,36.4 48.8,27.6 48.8,22 50.7,20.1 v1(50.7,18)
  Bottom Layer w0.2: v1(37,36.9) U1.U10@37.5,37.4 ; v1(50.7,18) 50.7,17.8 50.9,17.6 HDR2.92@50.9,16.5
SP9: HDR2.88 U1.M6 | length 83.9
  MidLayer1 w0.2: v1(33,41.9) 34,41.9 34.1,41.9 34.8,42.6 35.7,42.6 36.1,43 36.1,43.6 36.1,45.6 35,46.7 35,48.2 35.6,48.8 v1(35.6,53.4) ; v1(46.5,53) 46.5,51.5 46.3,51.3 46.3,46.6 47.3,45.6 47.3,43.2 50,40.5 56.7,40.5 62.6,34.6 62.6,24 58.4,19.8 50.3,19.8 49.3,18.8 v1(49.3,18.2)
  MidLayer2 w0.2: v1(35.6,53.4) 46.1,53.4 v1(46.5,53)
  Bottom Layer w0.2: U1.M6@32.5,41.4 v1(33,41.9) ; HDR2.88@49.3,16.5 v1(49.3,18.2)
SP10: HDR2.86 U1.W6 | length 56.6
  MidLayer1 w0.2: v1(44.4,42.2) 46.5,40.1 56.5,40.1 62.2,34.4 62.2,24.2 58.2,20.2 49.4,20.2 v1(48.9,19.7)
  MidLayer2 w0.2: v1(40,40.9) 40.6,41.5 41.7,41.5 42.5,40.7 43.8,40.7 44.4,41.3 v1(44.4,42.2)
  Bottom Layer w0.2: U1.W6@39.5,41.4 v1(40,40.9) ; HDR2.86@48.5,16.5 48.5,19.3 v1(48.9,19.7)
SP11: HDR2.84 U1.Y6 | length 53.4
  MidLayer1 w0.2: v1(41,40.9) 41.7,40.9 42.9,39.7 56.3,39.7 61.8,34.2 61.8,24.4 58,20.6 48.5,20.6 v1(48.2,20.3)
  Bottom Layer w0.2: U1.Y6@40.5,41.4 v1(41,40.9) ; HDR2.84@47.7,16.5 47.7,19.8 v1(48.2,20.3)
SP12: HDR2.82 U1.V7 | length 55.4
  MidLayer1 w0.127: 39.5,40.4 41.5,40.4
  MidLayer1 w0.2: v1(39,39.9) 39.5,40.4 ; 41.5,40.4 42.6,39.3 56.1,39.3 61.4,34 61.4,24.6 57.8,21 v1(47.6,21)
  Bottom Layer w0.2: U1.V7@38.5,40.4 v1(39,39.9) ; HDR2.82@46.9,16.5 46.9,20.3 v1(47.6,21)
SP13: HDR2.80 U1.W8 | length 53.5
  MidLayer1 w0.2: v1(40,39.9) 41,38.9 42,38.9 55.9,38.9 60.2,34.6 60.2,24.1 57.6,21.5 54.4,21.5 54.2,21.7 v1(51.2,21.7)
  Bottom Layer w0.2: U1.W8@39.5,39.4 v1(40,39.9) ; HDR2.80@46.1,16.5 46.1,20.8 47,21.7 v1(51.2,21.7)
SP14: HDR2.78 U1.U7 | length 56.7
  MidLayer1 w0.127: 38.5,40.4 38.5,39.6 38.7,39.4 39.5,39.4
  MidLayer1 w0.2: v1(38,40.9) 38.5,40.4 ; 39.5,39.4 39.6,39.3 39.8,39.3 40.6,38.5 55.7,38.5 59.8,34.4 59.8,24.3 57.4,21.9 54.7,21.9 54.2,22.4 v1(50.5,22.4)
  Bottom Layer w0.2: U1.U7@37.5,40.4 v1(38,40.9) ; HDR2.78@45.3,16.4 HDR2.78@45.3,16.5 45.3,21.1 46.6,22.4 v1(50.5,22.4)
SP15: HDR2.76 U1.V8 | length 54.5
  MidLayer1 w0.2: v1(39,38.9) 39.6,38.9 40.3,38.2 40.3,37.731 41.031,37 43.6,37 44.5,36.1 57.5,36.1 59.4,34.2 59.4,24.5 57.2,22.3 55.3,22.3 54.6,23 v1(49.8,23)
  Bottom Layer w0.2: U1.V8@38.5,39.4 v1(39,38.9) ; HDR2.76@44.5,16.5 44.5,21.1 46.4,23 v1(49.8,23)
SPI_CLK: HDR1.46 U1.L4 | length 29.3
  MidLayer1 w0.127: 32.5,44.4 32.5,45.4
  MidLayer1 w0.2: v1(32,43.9) 32.5,44.4 ; 32.5,45.4 v1(32.5,69.8)
  Bottom Layer w0.2: U1.L4@31.5,43.4 v1(32,43.9) ; HDR1.46@32.5,67.3 32.5,69 v1(32.5,69.8)
SPI_DIN: HDR1.44 U1.L3 | length 26.6
  MidLayer1 w0.2: v1(31.7,69) 31.7,60.4 32,60.1 v1(32,44.9)
  Bottom Layer w0.2: U1.L3@31.5,44.4 v1(32,44.9)
  Bottom Layer w0.3: HDR1.44@31.7,67.3 v1(31.7,69)
SPI_DOUT: HDR1.50 U1.M4 | length 29.6
  MidLayer1 w0.127: 33.5,44.4 33.5,45.4
  MidLayer1 w0.2: v1(33,43.9) 33.5,44.4 ; 33.5,45.4 33.5,49.9 33.7,50.1 33.7,66.1 34.1,66.5 v1(34.1,69.8)
  Bottom Layer w0.2: U1.M4@32.5,43.4 v1(33,43.9) ; HDR1.50@34.1,67.3 v1(34.1,69.8)
SPI_MODE: HDR1.52 U1.N4 | length 30.3
  MidLayer1 w0.127: 34.5,43.5 34.5,44.4
  MidLayer1 w0.2: v1(33,42.9) 33.9,42.9 34.5,43.5 ; 34.5,44.4 33.9,45 33.9,49.6 34.1,49.8 34.1,65.3 34.9,66.1 v1(34.9,69)
  Bottom Layer w0.2: v1(33,42.9) U1.N4@33.5,43.4 ; HDR1.52@34.9,67.3 v1(34.9,69)
SPI_SEL: HDR1.48 U1.M3 | length 26.6
  MidLayer1 w0.2: v1(33,44.9) 33,50.1 33.3,50.4 v1(33.3,69)
  Bottom Layer w0.2: U1.M3@32.5,44.4 v1(33,44.9) ; HDR1.48@33.3,67.3 v1(33.3,69)
SRAM0_A0: U1.AA18 U3.5 | length 14.5
  Bottom Layer w0.2: U1.AA18@41.5,29.4 42,28.9 43,28.9 43.6,28.3 49.7,28.3 52.7,25.3 U3.5@54.35,25.3
SRAM0_A1: U1.Y19 U3.4 | length 15.5
  Bottom Layer w0.2: U1.Y19@40.5,28.4 41,27.9 49.5,27.9 52.9,24.5 U3.4@54.35,24.5
SRAM0_A2: U1.AB20 U3.3 | length 13.4
  Bottom Layer w0.2: U1.AB20@42.5,27.4 49.4,27.4 53.075,23.725 U3.3@54.35,23.7 U3.3@54.4,23.7
SRAM0_A3: U1.AA20 U3.2 | length 14.8
  Bottom Layer w0.2: U1.AA20@41.5,27.4 42,26.9 49.2,26.9 53.175,22.925 U3.2@54.35,22.9 U3.2@54.4,22.9
SRAM0_A4: U1.Y20 U3.1 | length 16
  MidLayer1 w0.2: v1(41,26.9) 41.3,26.6 42.3,26.6 42.6,26.3 v1(43.8,26.3)
  Bottom Layer w0.2: U1.Y20@40.5,27.4 v1(41,26.9) ; v1(43.8,26.3) 49.2,26.3 53.4,22.1 U3.1@54.35,22.1
SRAM0_A5: U1.W19 U3.44 | length 29.9
  MidLayer1 w0.2: v1(40,27.9) 40.3,27.6 41.4,27.6 42,27 44.1,27 44.5,26.6 v1(44.5,25.5)
  Bottom Layer w0.2: U1.W19@39.5,28.4 v1(40,27.9) ; v1(44.5,25.5) 49.4,25.5 53.6,21.3 57.2,21.3 58,22.1 U3.44@65.5,22.1
SRAM0_A6: U1.V18 U3.43 | length 29.7
  MidLayer1 w0.127: 39.5,28.4 40.5,28.4
  MidLayer1 w0.2: v1(39,28.9) 39.5,28.4 ; 40.5,28.4 40.8,28.1 41.466,28.1 42.166,27.4 52.2,27.4 v1(56.7,22.9)
  Bottom Layer w0.2: U1.V18@38.5,29.4 v1(39,28.9) ; v1(56.7,22.9) U3.43@65.5,22.9
SRAM0_A7: U1.Y18 U3.42 | length 27.4
  MidLayer1 w0.2: v1(41,28.9) 41.8,28.9 42.9,27.8 52.5,27.8 56.6,23.7 v1(57.2,23.7)
  Bottom Layer w0.2: U1.Y18@40.5,29.4 v1(41,28.9) ; v1(57.2,23.7) U3.42@65.5,23.7
SRAM0_A8: U1.AB11 U3.18 | length 12.1
  Bottom Layer w0.2: U1.AB11@42.5,36.4 52.9,36.4 53.6,35.7 U3.18@54.35,35.7
SRAM0_A9: U1.V9 U3.27 | length 29.6
  MidLayer1 w0.2: v1(39,37.9) 40.7,36.2 43.1,36.2 44.181,35.119 49.981,35.119 50.8,34.3 55.7,34.3 56.1,33.9 57.4,33.9 v1(58,34.1)
  Bottom Layer w0.2: U1.V9@38.5,38.4 v1(39,37.9) ; v1(58,34.1) 59.6,35.7 U3.27@65.5,35.7
SRAM0_A10: U1.AB8 U3.26 | length 24.3
  Bottom Layer w0.2: U1.AB8@42.5,39.4 44,39.4 44.1,39.5 56.1,39.5 59.1,36.5 U3.26@65.5,36.5
SRAM0_A11: U1.AA8 U3.25 | length 25.3
  Bottom Layer w0.2: U1.AA8@41.5,39.4 42,39.9 56.3,39.9 58.9,37.3 U3.25@65.5,37.3
SRAM0_A12: U1.AA6 U3.24 | length 25.6
  Bottom Layer w0.2: U1.AA6@41.5,41.4 42,40.9 42.8,40.9 43.4,40.3 56.5,40.3 59,37.8 64,37.8 64.3,38.1 U3.24@65.5,38.1
SRAM0_A13: U1.Y5 U3.23 | length 27.1
  Bottom Layer w0.2: U1.Y5@40.5,42.4 41,41.9 42.868,41.9 42.968,42 43.7,42 44.5,41.2 45,40.7 56.7,40.7 59.2,38.2 63.8,38.2 64.5,38.9 U3.23@65.5,38.9
SRAM0_A14: U1.W9 U3.22 | length 15.1
  Bottom Layer w0.2: U1.W9@39.5,38.4 40,38.9 U3.22@54.35,38.9
SRAM0_A15: U1.AA10 U3.21 | length 13.1
  Bottom Layer w0.2: U1.AA10@41.5,37.4 41.55,37.45 42,37.9 43.3,37.9 43.5,38.1 U3.21@54.35,38.1
SRAM0_A16: U1.AB10 U3.20 | length 11.9
  Bottom Layer w0.2: U1.AB10@42.5,37.4 53,37.4 53.1,37.3 U3.20@54.35,37.3
SRAM0_A17: U1.Y10 U3.19 | length 14.2
  Bottom Layer w0.2: U1.Y10@40.5,37.4 41,36.9 52.966,36.9 53.366,36.5 U3.19@54.35,36.5
SRAM0_A18: U1.V10 U3.28 | length 29.3
  MidLayer1 w0.2: v1(39,36.9) 39,36.8 40,35.8 42.8,35.8 43.9,34.7 49.731,34.7 49.963,34.469 50.531,33.9 55.4,33.9 55.8,33.5 v1(58.7,33.5)
  Bottom Layer w0.2: U1.V10@38.5,37.4 v1(39,36.9) ; v1(58.7,33.5) 60.1,34.9 U3.28@65.5,34.9
SRAM0_D0: U1.AA17 U3.7 | length 14.3
  Bottom Layer w0.2: U1.AA17@41.5,30.4 42,29.9 42.7,29.9 42.8,29.8 43.5,29.8 44.2,29.1 50.2,29.1 52.4,26.9 U3.7@54.35,26.9
SRAM0_D1: U1.Y17 U3.8 | length 15.5
  Bottom Layer w0.2: U1.Y17@40.5,30.4 41,30.9 42.8,30.9 42.9,31 43.6,31 45.1,29.5 50.5,29.5 52.3,27.7 U3.8@54.35,27.7
SRAM0_D2: U1.Y16 U3.9 | length 15.5
  Bottom Layer w0.2: U1.Y16@40.5,31.4 41,31.9 43.3,31.9 45.3,29.9 50.8,29.9 52.2,28.5 U3.9@54.35,28.5
SRAM0_D3: U1.AB15 U3.10 | length 13.1
  Bottom Layer w0.2: U1.AB15@42.5,32.4 44.7,32.4 45.5,31.6 49.7,31.6 52,29.3 U3.10@54.35,29.3
SRAM0_D4: U1.AA15 U3.13 | length 13.6
  Bottom Layer w0.2: U1.AA15@41.5,32.4 42,32.9 44.9,32.9 45.8,32 52.1,32 52.4,31.7 U3.13@54.35,31.7
SRAM0_D5: U1.AA13 U3.14 | length 13.6
  Bottom Layer w0.2: U1.AA13@41.5,34.4 42,33.9 44.6,33.9 46,32.5 U3.14@54.35,32.5
SRAM0_D6: U1.AB13 U3.15 | length 12.3
  Bottom Layer w0.2: U1.AB13@42.5,34.4 43,34.4 44.7,34.4 45.8,33.3 U3.15@54.35,33.3
SRAM0_D7: U1.Y13 U3.16 | length 14.4
  Bottom Layer w0.2: U1.Y13@40.5,34.4 40.55,34.45 41,34.9 44.9,34.9 45.7,34.1 U3.16@54.35,34.1
SRAM0_D8: U1.U13 U3.29 | length 31.1
  MidLayer1 w0.127: 38.5,35.4 39.5,35.4
  MidLayer1 w0.2: v1(37,34.9) 37.5,35.4 38.5,35.4 ; 39.5,35.4 42.5,35.4 43.6,34.3 49.566,34.3 50.366,33.5 55.1,33.5 55.7,32.9 v1(56.5,32.9)
  Bottom Layer w0.2: v1(37,34.9) U1.U13@37.5,34.4 ; v1(56.5,32.9) 57.2,32.9 57.3,33 58.1,33 58.3,32.8 59.2,32.8 60.5,34.1 U3.29@65.5,34.1
SRAM0_D9: U1.V13 U3.30 | length 28.8
  MidLayer1 w0.2: v1(39,34.9) 42.4,34.9 43.4,33.9 49.4,33.9 50.2,33.1 54.8,33.1 55.7,32.2 56.9,32.2 57.1,32.4 v1(57.7,32.4)
  Bottom Layer w0.2: U1.V13@38.5,34.4 v1(39,34.9) ; v1(57.7,32.4) 59.6,32.4 60.5,33.3 U3.30@65.5,33.3
SRAM0_D10: U1.W13 U3.31 | length 29.3
  MidLayer1 w0.127: 39.5,34.4 41.5,34.4
  MidLayer1 w0.2: v1(39,33.9) 39.5,34.4 ; 41.5,34.4 42.2,34.4 43.1,33.5 49.1,33.5 49.9,32.7 54.6,32.7 55.7,31.6 v1(56.5,31.6)
  Bottom Layer w0.2: v1(39,33.9) U1.W13@39.5,34.4 ; v1(56.5,31.6) 58,31.6 58.2,31.8 62.4,31.8 63.5,32.9 64.3,32.9 64.7,32.5 U3.31@65.5,32.5
SRAM0_D11: U1.W14 U3.32 | length 29
  MidLayer1 w0.127: 40.5,33.4 41.5,33.4
  MidLayer1 w0.2: v1(40,33.9) 40.5,33.4 ; 41.5,33.4 42.2,32.7 48.631,32.7 49.431,31.9 54.2,31.9 55.8,30.3 57,30.3 57.9,29.4 v1(58.7,29.4)
  Bottom Layer w0.2: U1.W14@39.5,33.4 v1(40,33.9) ; v1(58.7,29.4) 59.4,30.1 62.7,30.1 64.3,31.7 U3.32@65.5,31.7
SRAM0_D12: U1.V14 U3.35 | length 29.4
  MidLayer1 w0.2: v1(39,32.9) 39.6,32.3 48.466,32.3 49.266,31.5 54,31.5 v1(56.7,28.8)
  Bottom Layer w0.2: U1.V14@38.5,33.4 v1(39,32.9) ; v1(56.7,28.8) 57.1,28.8 57.4,29.1 58,29.1 58.3,28.8 62.4,28.8 64.1,28.8 64.6,29.3 U3.35@65.5,29.3
SRAM0_D13: U1.U16 U3.36 | length 30.5
  MidLayer1 w0.2: v1(38,30.9) 39,31.9 48.3,31.9 50,30.2 54.4,30.2 56.4,28.2 56.8,28.2 57.1,27.9 v1(58.5,27.9)
  Bottom Layer w0.2: U1.U16@37.5,31.4 v1(38,30.9) ; v1(58.5,27.9) 63.9,27.9 64.5,28.5 U3.36@65.5,28.5
SRAM0_D14: U1.V16 U3.37 | length 29.3
  MidLayer1 w0.2: v1(39,30.9) 39.6,31.5 44,31.5 45.7,29.8 54.2,29.8 56.3,27.7 v1(56.7,27.5)
  Bottom Layer w0.2: U1.V16@38.5,31.4 v1(39,30.9) ; v1(56.7,27.5) 57.7,27.5 57.9,27.3 64.1,27.3 64.5,27.7 U3.37@65.5,27.7
SRAM0_D15: U1.W16 U3.38 | length 28.3
  MidLayer1 w0.2: v1(40,30.9) 42.5,30.9 42.7,31.1 43.6,31.1 45.3,29.4 53.966,29.4 56.7,26.7 v1(57.5,26.7)
  Bottom Layer w0.2: U1.W16@39.5,31.4 v1(40,30.9) ; v1(57.5,26.7) 57.5,26.9 U3.38@65.5,26.9
SRAM0_E: U1.AB18 U3.6 | length 13.2
  Bottom Layer w0.2: U1.AB18@42.5,29.4 43.2,29.4 43.9,28.7 49.9,28.7 52.5,26.1 U3.6@54.35,26.1
SRAM0_LB: U1.V17 U3.39 | length 29.2
  MidLayer1 w0.127: 39.5,30.4 40.5,30.4
  MidLayer1 w0.2: v1(39,29.9) 39.5,30.4 ; 40.5,30.4 41.997,30.4 43.397,29 53.8,29 v1(56.7,26.1)
  Bottom Layer w0.2: U1.V17@38.5,30.4 v1(39,29.9) ; v1(56.7,26.1) U3.39@65.5,26.1
SRAM0_OE: TP1.1 U1.W18 U3.41 | length 36.7
  MidLayer1 w0.127: 40.5,29.4 41.5,29.4
  MidLayer1 w0.2: v1(40,28.9) 40.5,29.4 ; 41.5,29.4 41.866,29.4 43.066,28.2 53,28.2 v1(56.7,24.5)
  Bottom Layer w0.2: U1.W18@39.5,29.4 v1(40,28.9) ; v1(56.7,24.5) U3.41@65.5,24.5 66.6,24.5 66.9,24.2 66.9,19.4 TP1.1@65.5,18
SRAM0_UB: U1.W17 U3.40 | length 28.1
  MidLayer1 w0.2: v1(40,29.9) 41.931,29.9 43.231,28.6 53.166,28.6 56.466,25.3 v1(57.2,25.3)
  Bottom Layer w0.2: U1.W17@39.5,30.4 v1(40,29.9) ; v1(57.2,25.3) 58.4,25.3 U3.40@65.5,25.3
SRAM0_W: TP6.1 U1.W10 U3.17 | length 19.5
  Bottom Layer w0.2: U1.W10@39.5,37.4 40,36.9 40,36.1 40.2,35.9 52.7,35.9 53.19,35.41 53.19,35.21 53.5,34.9 U3.17@54.35,34.9 55.225,34.9 56.5,34.9 TP6.1@57,35 TP6.1@57.4,34.9
SRAM1_A0: U1.D11 U4.5 | length 23.9
  MidLayer1 w0.2: v1(5.2,42.3) 12.2,35.3 20.9,35.3 21.5,35.9 v1(24,35.9)
  Bottom Layer w0.2: U4.5@3.925,42.3 v1(5.2,42.3) ; v1(24,35.9) U1.D11@24.5,36.4
SRAM1_A1: U1.E12 U4.4 | length 27.7
  MidLayer1 w0.127: 23.5,35.4 24.5,35.4
  MidLayer1 w0.2: v1(2.6,41.5) 2.607,41.493 5.307,41.493 11.9,34.9 20.9,34.9 21.1,34.9 21.7,35.5 23.4,35.5 23.5,35.4 ; 24.5,35.4 v1(25,35.9)
  Bottom Layer w0.2: v1(2.6,41.5) U4.4@3.925,41.5 ; v1(25,35.9) U1.E12@25.5,35.4
SRAM1_A2: U1.D13 U4.3 | length 23.6
  MidLayer1 w0.127: 21.5,34.4 23.5,34.4
  MidLayer1 w0.2: v1(5.2,40.7) 11.5,34.4 21.5,34.4 ; 23.5,34.4 v1(24,34.9)
  Bottom Layer w0.2: U4.3@3.925,40.7 v1(5.2,40.7) ; v1(24,34.9) U1.D13@24.5,34.4
SRAM1_A3: U1.C13 U4.2 | length 24.9
  MidLayer1 w0.2: v1(2.6,39.9) 5.3,39.9 11.3,33.9 v1(23,33.9)
  Bottom Layer w0.2: v1(2.6,39.9) U4.2@3.925,39.9 ; v1(23,33.9) U1.C13@23.5,34.4
SRAM1_A4: U1.E17 U4.1 | length 29
  Top Layer w0.2: v1(17.7,30.8) 18.4,31.5 20.8,31.5 21,31.3 25.6,31.3 v1(26,30.9)
  MidLayer1 w0.2: v1(10.4,31.6) 16.9,31.6 v1(17.7,30.8)
  Bottom Layer w0.2: U4.1@3.925,39.1 5.1,39.1 5.4,38.8 5.4,36.3 6.8,34.9 7.1,34.6 7.1,33.3 8.8,31.6 v1(10.4,31.6) ; U1.E17@25.5,30.4 v1(26,30.9)
SRAM1_A5: U1.B10 U4.44 | length 8.1
  Bottom Layer w0.2: U4.44@15.075,39.1 16.934,39.1 18.134,37.9 22,37.9 U1.B10@22.5,37.4
SRAM1_A6: U1.F9 U4.43 | length 15.5
  MidLayer1 w0.2: v1(13.7,39.1) 21.6,39.1 22.3,39.8 25.1,39.8 25.7,39.2 v1(26,38.9)
  Bottom Layer w0.2: v1(13.7,39.1) 14.2,39.9 U4.43@15.075,39.9 U4.43@15.1,39.9 ; v1(26,38.9) 26.45,38.45 U1.F9@26.5,38.4
SRAM1_A7: U1.F7 U4.42 | length 16.5
  MidLayer1 w0.2: v1(13.2,40) 16.4,40 16.9,39.5 21,39.5 21.8,40.3 25.4,40.3 v1(26,40.9)
  Bottom Layer w0.2: v1(13.2,40) 13.7,40 14.2,40.7 U4.42@15.075,40.7 ; v1(26,40.9) U1.F7@26.5,40.4
SRAM1_A8: U1.A15 U4.18 | length 33.1
  Bottom Layer w0.2: U4.18@3.925,52.7 5.1,52.7 7.9,49.9 7.9,37.8 13.3,32.4 21,32.4 U1.A15@21.5,32.4
SRAM1_A9: U1.A5 U4.27 | length 14.4
  Bottom Layer w0.2: U4.27@15.075,52.7 16.2,52.7 18.7,50.2 18.8,50.1 18.8,44.1 18.8,43.831 20.231,42.4 21,42.4 U1.A5@21.5,42.4
SRAM1_A10: U1.B5 U4.26 | length 15.8
  Bottom Layer w0.2: U4.26@15.075,53.5 16.2,53.5 19.2,50.5 19.2,48.4 19.2,43.997 20.297,42.9 22,42.9 U1.B5@22.5,42.4
SRAM1_A11: U1.A4 U4.25 | length 14.9
  Bottom Layer w0.2: U4.25@15.075,54.3 16.2,54.3 19.6,50.9 19.6,44.163 20.363,43.4 U1.A4@21.5,43.4
SRAM1_A12: U1.B4 U4.24 | length 16.4
  Bottom Layer w0.2: U4.24@15.075,55.1 16.2,55.1 20,51.3 20,44.328 20.428,43.9 22,43.9 U1.B4@22.5,43.4
SRAM1_A13: U1.A3 U4.23 | length 14.8
  Bottom Layer w0.2: U4.23@15.075,55.9 16.2,55.9 20.4,51.7 20.4,45.732 21.436,44.696 21.436,44.464 U1.A3@21.5,44.4
SRAM1_A14: U1.A13 U4.22 | length 34.9
  Bottom Layer w0.2: U4.22@3.925,55.9 5.8,55.9 10.4,51.3 10.4,43.8 9.6,43 9.6,38.866 14.066,34.4 U1.A13@21.5,34.4
SRAM1_A15: U1.B13 U4.21 | length 35.8
  Bottom Layer w0.2: U4.21@3.925,55.1 5.8,55.1 10,50.9 10,44 9.2,43.2 9.2,38.7 14,33.9 22,33.9 U1.B13@22.5,34.4
SRAM1_A16: U1.A14 U4.20 | length 33.4
  Bottom Layer w0.2: U4.20@3.925,54.3 5.1,54.3 8.7,50.7 8.7,38.5 13.8,33.4 20.9,33.4 U1.A14@21.5,33.4
SRAM1_A17: U1.B14 U4.19 | length 34.5
  Bottom Layer w0.2: U4.19@3.925,53.5 5.1,53.5 8.3,50.3 8.3,38.1 13.5,32.9 22,32.9 U1.B14@22.5,33.4
SRAM1_A18: U1.B6 U4.28 | length 15.3
  Bottom Layer w0.2: U4.28@15.075,51.9 16.2,51.9 18.4,49.7 18.4,43.666 20.066,42 21.1,42 21.2,41.9 22,41.9 U1.B6@22.5,41.4
SRAM1_D0: U1.D10 U4.7 | length 23.7
  MidLayer1 w0.2: v1(5.2,43.9) 12,37.1 22.6,37.1 22.8,36.9 v1(24,36.9)
  Bottom Layer w0.2: U4.7@3.925,43.9 v1(5.2,43.9) ; v1(24,36.9) U1.D10@24.5,37.4
SRAM1_D1: U1.E10 U4.8 | length 27.7
  MidLayer1 w0.127: 23.5,37.4 24.5,37.4
  MidLayer1 w0.2: v1(2.6,44.7) 5.2,44.7 12.4,37.5 23.4,37.5 23.5,37.4 ; 24.5,37.4 v1(25,37.9)
  Bottom Layer w0.2: v1(2.6,44.7) U4.8@3.925,44.7 ; v1(25,37.9) U1.E10@25.5,37.4
SRAM1_D2: U1.D9 U4.9 | length 23.9
  MidLayer1 w0.2: v1(5.2,45.5) 12.7,38 23,38 23.1,37.9 v1(24,37.9)
  Bottom Layer w0.2: U4.9@3.925,45.5 v1(5.2,45.5) ; v1(24,37.9) U1.D9@24.5,38.4
SRAM1_D3: U1.E9 U4.10 | length 27.9
  MidLayer1 w0.127: 22.5,38.4 24.5,38.4
  MidLayer1 w0.2: v1(2.6,46.3) 5.5,46.3 13.4,38.4 22.5,38.4 ; 24.5,38.4 v1(25,38.9)
  Bottom Layer w0.2: v1(2.6,46.3) U4.10@3.925,46.3 ; v1(25,38.9) U1.E9@25.5,38.4
SRAM1_D4: U1.E14 U4.13 | length 37
  MidLayer1 w0.127: 23.5,33.4 24.5,33.4
  MidLayer1 w0.2: v1(9.4,32.2) 9.5,32.2 9.9,32.6 11.2,32.6 11.6,32.2 19.2,32.2 20.3,33.3 23.4,33.3 23.5,33.4 ; 24.5,33.4 v1(25,33.9)
  Bottom Layer w0.2: U4.13@3.925,48.7 5.5,48.7 5.9,48.3 5.9,36.4 9.4,32.9 v1(9.4,32.2) ; v1(25,33.9) 25.45,33.45 U1.E14@25.5,33.4
SRAM1_D5: U1.A18 U4.14 | length 32.9
  Bottom Layer w0.2: U4.14@3.925,49.5 5.5,49.5 6.3,48.7 6.3,36.7 13.6,29.4 U1.A18@21.5,29.4
SRAM1_D6: U1.B17 U4.15 | length 34.3
  Bottom Layer w0.2: U4.15@3.925,50.3 5.4,50.3 6.7,49 6.7,36.9 13.7,29.9 22,29.9 U1.B17@22.5,30.4
SRAM1_D7: U1.C17 U4.16 | length 35.2
  Bottom Layer w0.2: U4.16@3.925,51.1 5.2,51.1 7.1,49.2 7.1,37.1 12.8,31.4 20.7,31.4 21.2,30.9 23,30.9 U1.C17@23.5,30.4
SRAM1_D8: U1.C7 U4.29 | length 16.4
  Bottom Layer w0.2: U4.29@15.075,51.1 16.2,51.1 18,49.3 18,43.5 20.1,41.4 20.1,41.218 ; 20.091,41.209 20.5,40.8 21.1,40.8 21.2,40.9 23,40.9 U1.C7@23.5,40.4
SRAM1_D9: U1.B8 U4.30 | length 15.9
  Bottom Layer w0.2: U4.30@15.075,50.3 16.2,50.3 17.6,48.9 17.6,42.1 19.8,39.9 22,39.9 U1.B8@22.5,39.4
SRAM1_D10: U1.A8 U4.31 | length 15.1
  Bottom Layer w0.2: U4.31@15.075,49.5 16.1,49.5 17.2,48.4 17.2,40.7 18.5,39.4 U1.A8@21.5,39.4
SRAM1_D11: U1.B9 U4.32 | length 16.1
  Bottom Layer w0.2: U4.32@15.075,48.7 16.1,48.7 16.8,48 16.8,40.4 18.3,38.9 22,38.9 U1.B9@22.5,38.4
SRAM1_D12: U1.A9 U4.35 | length 13.1
  Bottom Layer w0.2: U4.35@15.075,46.3 16.1,46.3 16.4,46 16.4,40.2 18.2,38.4 U1.A9@21.5,38.4
SRAM1_D13: U1.D5 U4.36 | length 13.3
  MidLayer1 w0.127: 22.5,43.4 23.5,43.4
  MidLayer1 w0.2: v1(13.8,45.5) 18.9,45.5 21,43.4 22.5,43.4 ; 23.5,43.4 v1(24,42.9)
  Bottom Layer w0.2: v1(13.8,45.5) U4.36@15.075,45.5 ; v1(24,42.9) 24.45,42.45 U1.D5@24.5,42.4
SRAM1_D14: U1.C5 U4.37 | length 12.9
  MidLayer1 w0.2: v1(13.3,44.7) 19.1,44.7 20.9,42.9 v1(23,42.9)
  Bottom Layer w0.2: v1(13.3,44.7) U4.37@15.075,44.7 ; v1(23,42.9) U1.C5@23.5,42.4
SRAM1_D15: U1.D6 U4.38 | length 13
  MidLayer1 w0.127: 22.5,42.4 23.5,42.4
  MidLayer1 w0.2: v1(13.8,43.9) 19.334,43.9 20.834,42.4 22.5,42.4 ; 23.5,42.4 v1(24,41.9)
  Bottom Layer w0.2: v1(13.8,43.9) U4.38@15.075,43.9 ; v1(24,41.9) U1.D6@24.5,41.4
SRAM1_E: U1.E11 U4.6 | length 27.9
  MidLayer1 w0.127: 23.5,36.4 24.5,36.4
  MidLayer1 w0.2: v1(2.6,43.1) 5.434,43.1 12.734,35.8 20.6,35.8 21.2,36.4 23.5,36.4 ; 24.5,36.4 v1(25,36.9)
  Bottom Layer w0.2: v1(2.6,43.1) U4.6@3.925,43.1 ; v1(25,36.9) U1.E11@25.5,36.4
SRAM1_LB: U1.C6 U4.39 | length 13
  MidLayer1 w0.2: v1(13.2,43.2) 19.4,43.2 20.6,42 21.8,42 21.9,41.9 v1(23,41.9)
  Bottom Layer w0.2: v1(13.2,43.2) 14.1,43.2 14.2,43.1 U4.39@15.075,43.1 ; v1(23,41.9) U1.C6@23.5,41.4
SRAM1_OE: TP2.1 U1.D7 U4.41 | length 13.8
  MidLayer1 w0.2: TP2.1@13.3,41.3 18.4,41.3 19.3,40.4 21.3,40.4 21.8,40.9 v1(24,40.9)
  Bottom Layer w0.2: TP2.1@13.3,41.3 13.5,41.5 U4.41@15.075,41.5 ; v1(24,40.9) U1.D7@24.5,40.4
SRAM1_UB: U1.E7 U4.40 | length 14.4
  MidLayer1 w0.127: 22.5,41.4 24.5,41.4
  MidLayer1 w0.2: v1(13.8,42.5) 14.9,42.5 15.7,41.7 19,41.7 19.9,40.8 21.1,40.8 21.6,41.3 22.4,41.3 22.5,41.4 ; 24.5,41.4 v1(25,40.9)
  Bottom Layer w0.2: v1(13.8,42.5) 14,42.5 14.2,42.3 U4.40@15.075,42.3 ; v1(25,40.9) U1.E7@25.5,40.4
SRAM1_W: TP7.1 U1.B15 U4.17 | length 42.1
  Bottom Layer w0.2: TP7.1@4,58 2.5,56.5 2.5,52.2 2.8,51.9 U4.17@3.925,51.9 5.1,51.9 7.5,49.5 7.5,37.4 13,31.9 22,31.9 U1.B15@22.5,32.4
SW0: HDR2.44 U1.L21 | length 10.9
  Bottom Layer w0.2: U1.L21@31.5,26.4 32,25.9 32,23 30.9,21.9 30.9,20.5 31.7,19.7 HDR2.44@31.7,16.5
SW1: HDR2.46 U1.M22 | length 9.2
  Bottom Layer w0.2: HDR2.46@32.5,16.5 32.5,19.9 32.1,20.3 32.1,22.2 32.5,22.6 U1.M22@32.5,25.4
SW2: HDR2.48 U1.M21 | length 10.2
  Bottom Layer w0.2: U1.M21@32.5,26.4 33,25.9 33,22.1 33.3,21.8 HDR2.48@33.3,16.5